# Altium PCB PCB1.PcbDoc
Units mil, origin at the board's own origin, x right, y up, seen from the top; angles counter-clockwise.
Board outline 6000 x 4000 mil, 2 copper layers (Top Layer, Bottom Layer); 7 components, 5 nets, 15 pads, 0 vias.
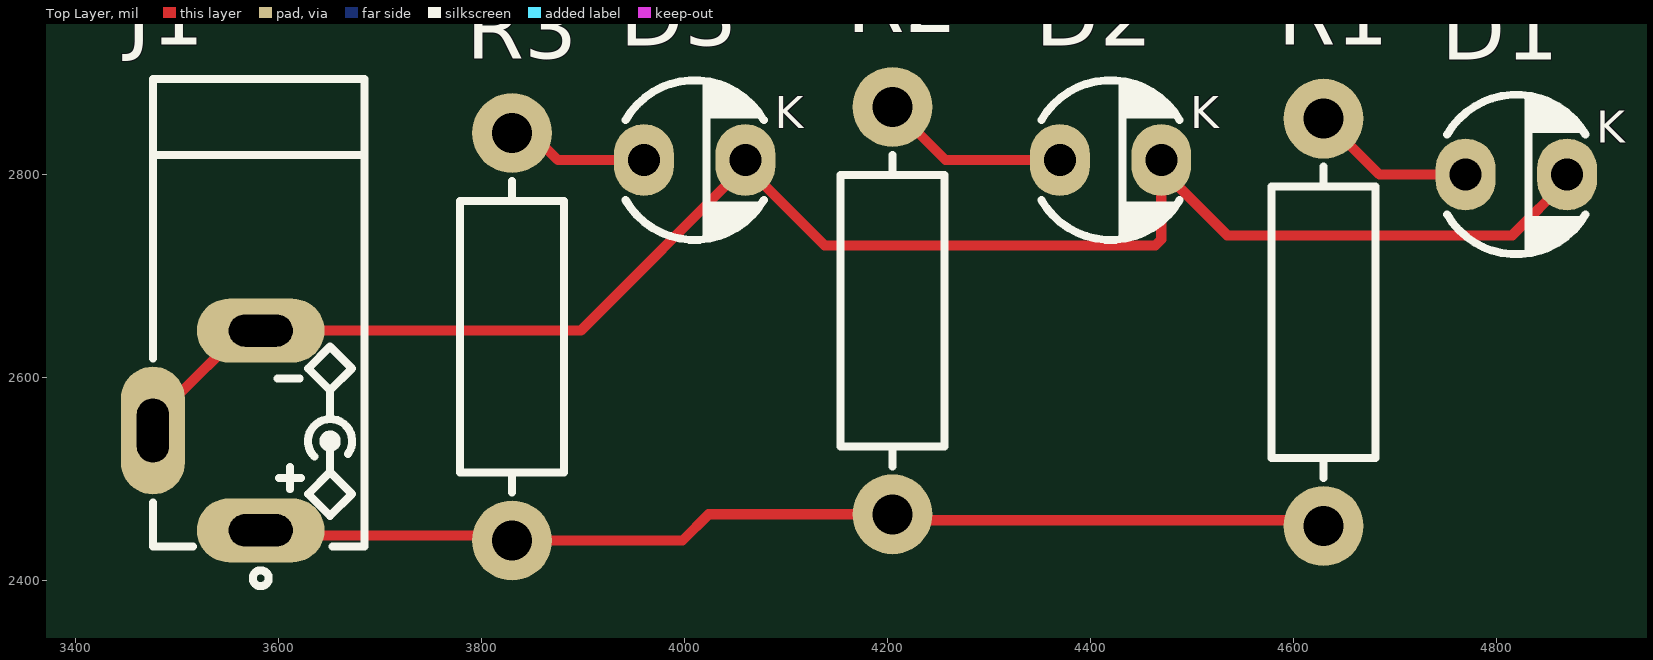
[diagram p0: Top Layer view]
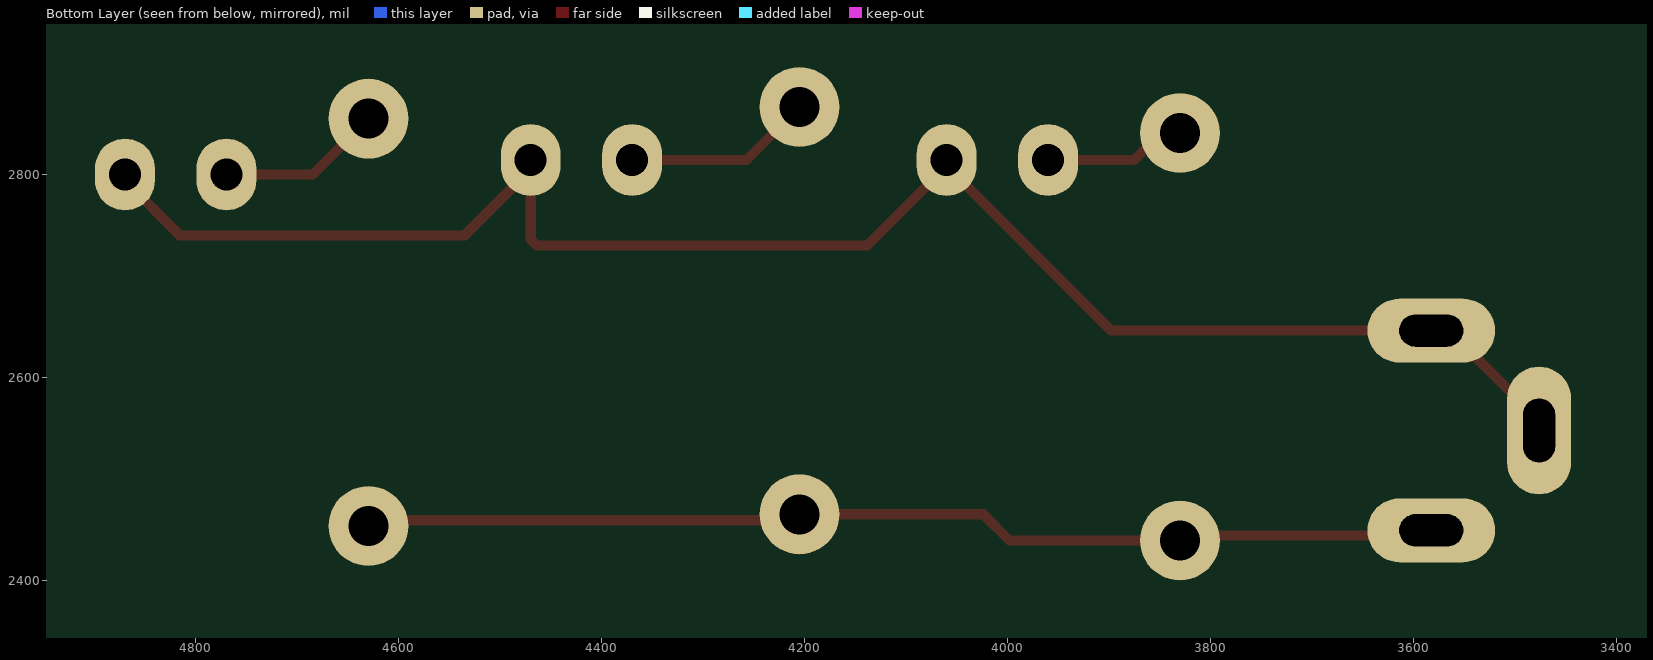
[diagram p1: Bottom Layer view, seen from below]
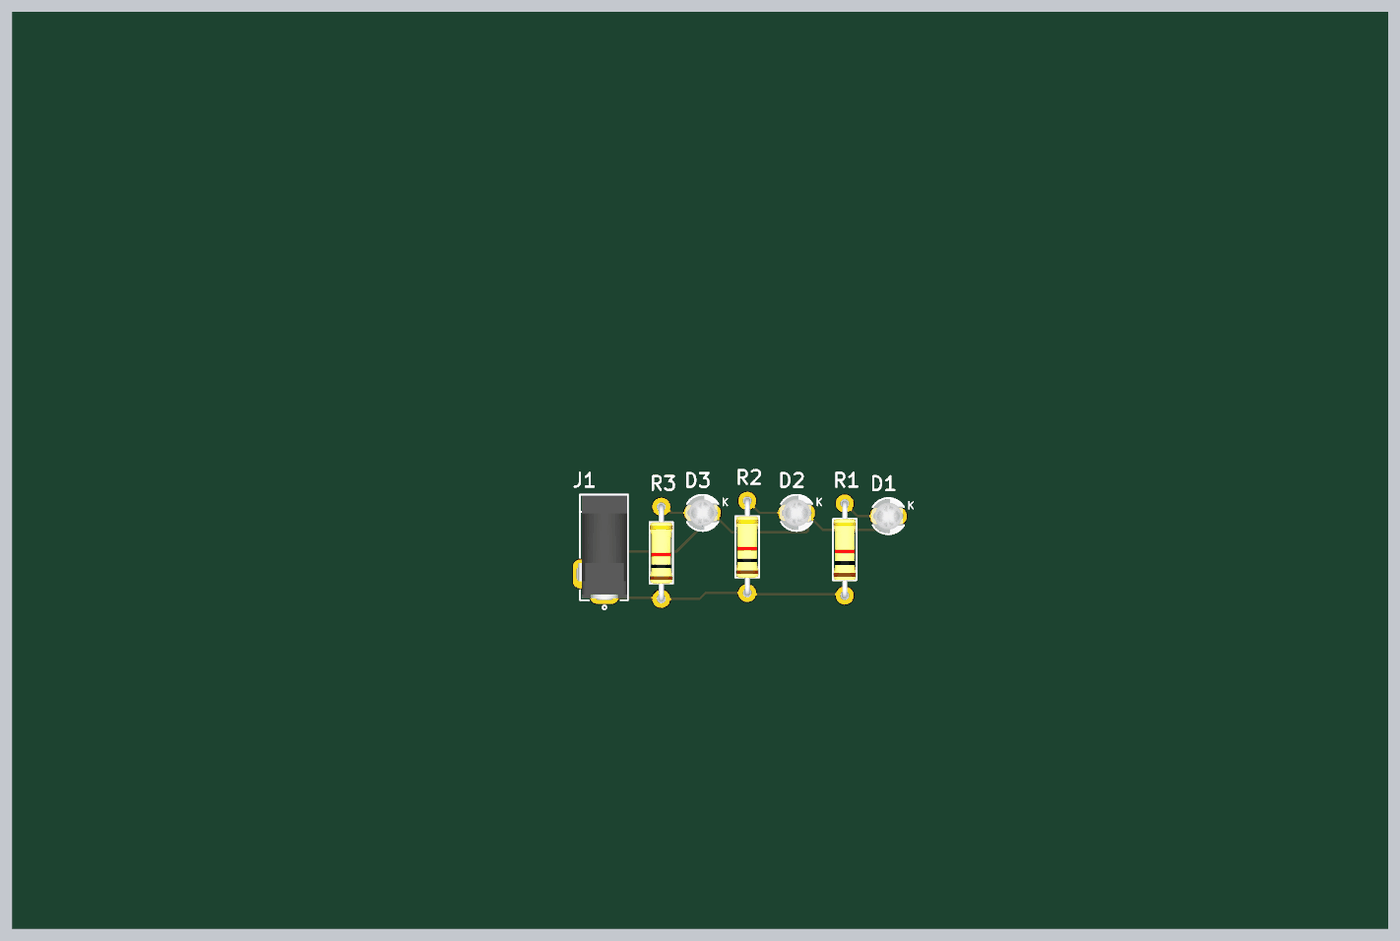
[diagram p2: 3D render of the assembled board from above, using the file's embedded part models]

## Layer stack, top to bottom
Top Solder: solder mask 0.4, Solder Resist, Dk 3.5
Top Layer: signal copper 1.4
Dielectric 1: dielectric 12.6, FR-4, Dk 4.8
Bottom Layer: signal copper 1.4
Bottom Solder: solder mask 0.4, Solder Resist, Dk 3.5

## Board outline
1000,1000 7000,1000 7000,5000 1000,5000

## Design rules (kind name [scope] priority, off if disabled: settings)
Clearance [All] p1: gap=10 ignorepadtopadclearanceinfootprint=FALSE except(0: Arc-Hole Track-Hole SMDPad-Hole THPad-Hole Via-Hole Fill-Hole Poly-Hole Region-Hole Text-Hole)
PolygonConnect [All] p1: connectstyle=Relief reliefconductorwidth=10 reliefentries=4 polygonreliefangle="90 Angle" airgapwidth=10
RoomDefinition Sheet1 [InComponentClass('Sheet1')] p1: confinementstyle=ConfineIn formatcopy=TRUE lockcomponents=FALSE outline 3450,2384.21 4935,2384.21 4935,3004.21 3450,3004.21
RoutingVias [All] p1: holewidth=28 width=50 viastyle="Through Hole" minholewidth=28 minwidth=50 maxholewidth=28 maxwidth=50
SolderMaskExpansion [All] p1: expansion=4 istentingtop=FALSE
Width [All] p1: maxlimit=10 minlimit=10 preferedwidth=10
30 further rules are at their usual default settings.

## Classes and differential pairs
component class Sheet1: D1 D2 D3 R1 R2 R3

## Components (designator, comment, footprint, x,y, rotation, side; value= is the part's Value field where it differs from the comment)
D1 "LED3MM" LED3MM 4820,2800 r0 top
D2 "LED3MM" LED3MM 4420,2814.21 r0 top
D3 "LED3MM" LED3MM 4010,2814.21 r0 top
J1 "DC_POWER_JACK" JAC_PWR1 3582.28,2449.21 r0 top
R1 "10K" R025W_AX04 4630,2654.21 r90 top
R2 "10K" R025W_AX04 4205,2665.79 r90 top
R3 "10K" R025W_AX04 3830,2640 r90 top

## Footprints (in the part's own frame and the unit in brackets; to place one, negate y for a bottom-side part, rotate by r counter-clockwise, add the part's x,y. Pads: shape width x height; smd on the part's side, far side on the other; paste and mask are expansions set on the pad)
JAC_PWR1 [mm] "DC POWER JACK, 1mm, Power Jack PJ-031C"
  oval 3.2x1.6 hole 0.8 slot 1.6 at 0 deg: 1(0,0) 2(0,5)
  oval 1.6x3.2 hole 0.8 slot 1.6 at 90 deg: 3(-2.7,2.5)
  silkscreen extent -2.7,-1.4 2.6,11.3, body extent -2.9,-0.4 2.5,11.2, height 7.4
LED3MM [mm] "LED THD 3MM"
  oval 1.5x1.8 hole 0.8: 1(-1.27,0) 2(1.27,0)
  silkscreen extent -1.73,-2 1.73,2, body extent -1.9,-1.9 1.6,1.9, height 6.5
R025W_AX04 [mm] "RESISTOR 1/4 WATT, AXIAL0.4"
  round 2 hole 1: 1(-5.1,0) 2(5.1,0)
  silkscreen extent -3.9,-1.3 3.9,1.3, body extent -5.38,-1.28 5.38,1.28, height 2.6

## Part data
D1 D2 D3: library part LED_THD_3MM, "LED, THD, 3MM, GREEN", ASSEMBLY=ASSEMBLY, DESC=DESCRIPTION, MANF=MANF, MANF_P#=MANF_PART#, PARAM2=2.2V, PRICE=PRICE
J1: library part CONN_PWR_JACKR1, "CONN, PWR JACK DC, PLUG DIAM 1.0MM RA THD", MANF="CUI STACK", MANF_P#="PJ-031CH, PJ-031C", PARAM="CH 3A, C 2A"
R1 R2 R3: library part RES_THD, "RESISTOR, THD", ASSEMBLY=ASSEMBLY, DESC=DESCRIPTION, DIST#=MOUSER, MANF="KOA SPEER", MANF_P#=RK73H1ETTP4701F, PARAM=0.063W, PARAM2=1%, PRICE="100= 0.5$"

## Nets (pads, with @x,y where several pads share a name; then routed paths per layer and width w, separated by ;. In a path a pad name is that pad's centre, name@x,y a point inside that pad or via, vN(x,y) a via of type N, cw(c..) or ccw(c..) an arc to the next point about the centre after c; other vN are vias at no path point)
GND: D1.2 D2.2 D3.2 J1.2 J1.3 | length 1674.8
  Top Layer w10: J1.3@3493.7,2547.64 3493.7,2575.2 3564.57,2646.06 3600,2646.06 3897.76,2646.06 D3.2@4060,2808.31 ; D3.2 D3.2@4060,2808.31 ; D2.2 D2.2@4470,2805 ; D1.2 4870,2794.09 4815.91,2740 4535,2740 D2.2@4470,2805 ; D3.2@4060,2808.31 4138.31,2730 4464.14,2730 4470,2735.86 D2.2@4470,2805
NetD1_1: D1.1 R1.2 | length 162.8
  Top Layer w10: R1.2 4685,2800 D1.1
NetD2_1: D2.1 R2.2 | length 186.7
  Top Layer w10: R2.2 4257.36,2814.21 D2.1
NetD3_1: D3.1 R3.2 | length 146.9
  Top Layer w10: R3.2 3848.6,2840.79 3875.18,2814.21 D3.1 D3.1@3960,2820.12
VCC: J1.1 R1.1 R2.1 R3.1 | length 1049.6
  Top Layer w10: J1.1@3600,2449.21 3605,2444.21 3825,2444.21 R3.1 3998.03,2439.21 4023.82,2465 R2.1 4210.79,2459.21 4624.21,2459.21 R1.1

## Text inside footprints (layer, text, board x,y; h text height)
D1: Top Overlay "K" at 4898.74,2831.5 h31.5
D2: Top Overlay "K" at 4498.74,2845.71 h31.5
D3: Top Overlay "K" at 4088.74,2845.71 h31.5